# Altium PCB ESP32 with USBC.PcbDoc (part 2 of 2)
Units mil, origin at the board's own origin, x right, y up, seen from the top; angles counter-clockwise.
Board outline 2700 x 1000 mil, 4 copper layers (Top Layer, L2, L3, Bottom Layer), stack 61.583 mil thick; 64 components, 73 nets, 299 pads, 159 vias.
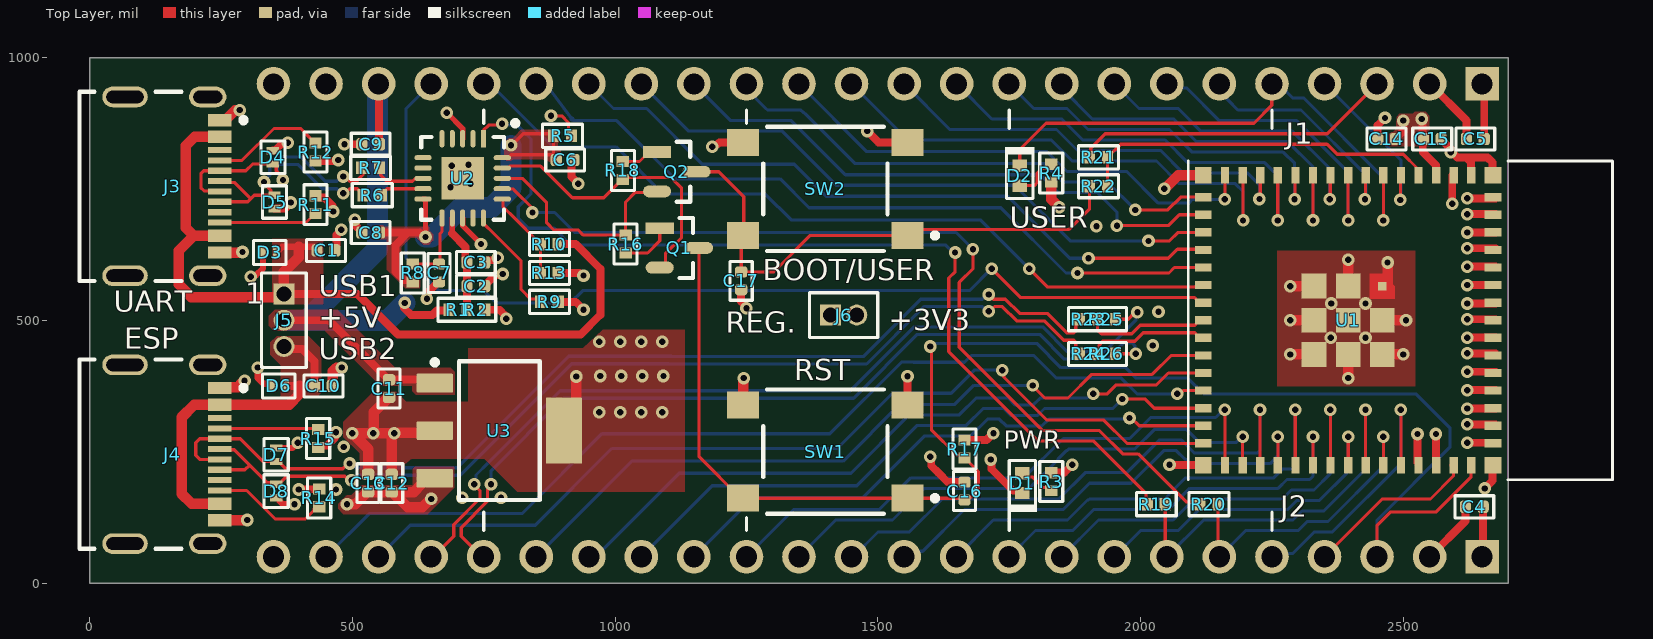
[diagram p0: Top Layer view]

## Via types
v1: diameter 24, hole 12, Top Layer to Bottom Layer, tented both sides, 159 vias

## Nets (pads, with @x,y where several pads share a name; then routed paths per layer and width w, separated by ;. In a path a pad name is that pad's centre, name@x,y a point inside that pad or via, vN(x,y) a via of type N, cw(c..) or ccw(c..) an arc to the next point about the centre after c; other vN are vias at no path point)
+3V3: C4.2 C5.2 C14.2 C15.2 J1.2 J2.1 J6.2 R2.1 R3.2 R4.2 R5.1 R17.2 U1.3 | length 4924.6
  Top Layer w6: v1(878,889) 898.44,889 911.38,876.06 911.38,857.81 914.19,855 R5.1@917.01,855
  Top Layer w15: R2.1 780.06,520 791.28,508.78 791.28,504.72 v1(793,503) ; R17.2 1707.01,272.01 v1(1720,285) ; R3.2 1855,210 v1(1870,225) ; C14.2 2485,846.18 2488.13,849.31 2489.31,849.31 2500,860 v1(2500,880) ; v1(2535,883) 2536.54,881.46 2536.54,846.86 2538.23,845.16 2537,843.93 2537,820 2561.99,795.01 2561.99,775.96 U1.3 ; J1.2 2620,880 C5.2 ; J2.1 2651.93,51.93 C4.2
  Top Layer w20: R4.2 1830,730 v1(1845,715)
  L2 w20: v1(2500,880) 2500.77,880.77 2531.68,880.77 2533.92,883 v1(2535,883) ; v1@2536.23,884.23 2536.23,882.85 2536.85,882.23 2573.02,882.23 2653.5,801.76 2653.5,253.71 2623,223.22 2623,146.13 2650,119.13 J2.1
  L2 w40: v1(793,503) 703,593 703,662.4 842.6,802 991,802 ; v1(878,889) 904,889 991,802 ; J6.2 1460,602.67 1572.33,715 ; v1(1720,285) 1810,285 ; v1(1870,225) 1810,285 ; v1(2535,883) 2535,865 2488,818 1948,818 v1(1845,715) ; v1@2536.23,884.23 2545.41,893.41 2545.41,945.41 J1.2 ; 991,802 1105,802 1192,715 1572.33,715 ; 1572.33,715 v1(1845,715) ; 1810,285 1837,312 1837,707 v1(1845,715)
+3V3_FTDI: C6.2 C8.2 R5.2 R8.1 U2.10 U2.20 | length 805.1
  Top Layer w6: U2.20 796.72,809.37 802.35,815 C6.2@886.14,815 ; v1(802,833) 803.25,833 825.25,855 882.99,855 882.99,819.33
  Top Layer w10.01: U2.10 639.11,730.63 639.34,730.4 v1(639.34,658.34)
  Top Layer w15: C8.2 552.17,667.24 606.24,667.24 ; R8.1 611.87,576.12 598.7,576.12 582,592.82 582,643 606.24,667.24 ; v1(639.34,658.34) 636.9,658.34 628,667.24 606.24,667.24
  Bottom Layer w40: v1(639.34,658.34) 650.34,658.34 707,715 765.09,715 802,751.91 v1(802,833)
+3V3_REG: C12.2 C13.2 J6.1 U3.3 | length 1254.6
  Top Layer w20: v1(490,150) 505.75,150 528.82,173.07 C13.2 C12.2 616.81,173.07 632.52,188.78 632.52,191.73 640.24,199.45 U3.3 ; C12.2@576.18,173.07 605.28,143.97 632.89,143.97 648.92,160 v1(650,160)
  L2 w40: v1(650,160) 690,120 975,120 1132,277 1132,336.4 1235.3,439.7 1339.7,439.7 J6.1
+5V: C9.2 C11.2 J1.22 J5.2 R1.1 U3.1 | length 1297.3
  Top Layer w10.01: C9.2@550.96,835.96 C9.2
  Top Layer w15: J5.2 455.75,500 568.82,386.93 650.59,386.93 U3.1 ; C9.2@550.96,835.96 J1.22@550.96,949.04 ; v1@598,524 612,510 652.72,510 661.22,518.5 682.47,518.5 R1.1
  Bottom Layer w40: J5.2 412.87,500 ; J1.22 548,948 548,635.13 412.87,500 ; v1(600,533) 567,500 412.87,500
+5V_VBUS1: C1.2 D3.2 J3.A4B9 J3.B4A9 J5.1 R10.2 | length 1642.7
  Top Layer w12: D3.2 366.8,640 397.93,640 433.07,640 C1.2@437.7,635.37
  Top Layer w15: J5.1 510,550 587,473 934.72,473 972,510.28 972,598 925,645 R10.2
  Top Layer w20: J3.B4A9 247.07,661 198,661 ; J3.A4B9 200.59,849.41 183,831.82 183,676 198,661 ; 397.93,640 397.93,619.93 370,592 J5.1 364,544 193.97,544 169.57,568.4 169.57,632.57 198,661
+5V_VBUS2: C10.2 D6.2 J4.A4B9 J4.B4A9 J5.3 | length 656.4
  Top Layer w15: J5.3 374.78,445.22 404.78,445.22 428.07,421.93 C10.2 400.43,375 D6.2
  Top Layer w20: J4.B4A9 194.41,150.59 175,170 175,315 199.57,339.57 J4.A4B9 379.57,339.57 400,360 400,374.57 400.43,375
+VCC_FTDI: C2.2 C3.2 R1.2 R2.2 U2.12 | length 186.8
  Top Layer w10.01: 689.99,665 689.99,694.26 U2.12
  Top Layer w15: 689.99,665 715.5,639.49 715.5,635.45 714.97,634.91 714.97,613.1 C3.2 C2.2 718.03,564.96 R1.2 R1.2
BTN_GPIO0: C17.2 Q2.3 R22.1 SW2.1 SW2.2 | length 1010.7
  Top Layer w6: Q2.3 1197.4,782.6 1245,735 1245,662.91 SW2.2 1240,657.91 C17.2 1301.93,591.93 1371.42,661.42 SW2.1 1568.08,673 1864,673 1902.99,711.99 R22.1
CHIP_PU: C16.2 J2.3 Q1.3 R17.1 SW1.1 SW1.2 U1.45 | length 2946.1
  Top Layer w6: Q1.3 1159.85,240.15 1238.58,161.42 SW1.2 SW1.1 1655.13,161.42 C16.2@1661.74,154.81 ; v1(1600,450) 1602.01,447.99 1602.01,291.35 1649.73,243.62 1659.37,243.62 R17.1 1666.18,237.99 1671.81,232.36 1671.81,231.18 1691.81,211.18 1691.81,178.39 1676.73,163.31 1670.24,163.31 C16.2 ; J2.3 2450,110 2475,135 2562.02,135 2628.92,201.9 U1.45@2628.92,224.04
  Top Layer w15: U1.45@2628.92,224.04 U1.45
  Bottom Layer w6: v1(1600,450) 1603.79,450 1609.79,456 1802.28,456 1848.28,410 1971.47,410 1991.47,390 2090,390 2120,360 2523.66,360 2588.97,294.69 2588.97,258.97 2450,120 J2.3
CON1_USB_N: D4.2 J3.A7 J3.B7 R6.1 | length 479.1
  Top Layer w6.23: J3.A7 246.73,745.98 218.02,745.98 212,752 212,779 217.45,784.45 J3.B7 297.35,784.45 310.11,797.2 D4.2 353.92,797.2 355.19,795.94 355.19,784.62 368,771.81 v1(368,767) ; v1(483,741.5) 486.65,741.5 495.53,750.39 509.79,750.39 520.99,739.18 R6.1
  Bottom Layer w6.23: v1(368,767) 368,768.65 357.11,779.53 357.11,792.92 360.76,796.57 396.43,796.57 442.61,750.39 470.47,750.39 479.35,741.5 v1(483,741.5)
CON1_USB_P: D5.2 J3.A6 J3.B6 R7.1 | length 469.5
  Top Layer w6.23: J3.B6 300.92,725.39 313.32,737.8 D5.2@348.47,737.8 ; J3.A6 250.3,762.1 276.62,762.1 307.12,731.59 ; v1(332,763) 332,760.49 344.69,747.8 344.69,741.57 D5.2@348.47,737.8 ; D5.2 348.87,737.8 D5.2@348.47,737.8 ; v1(483,773.5) 486.65,773.5 495.53,764.61 508.83,764.61 512.48,768.26 512.48,769.49 519.99,777
  Bottom Layer w6.23: v1(332,763) 332,764.65 342.89,775.53 342.89,798.82 354.87,810.8 402.32,810.8 448.51,764.61 470.47,764.61 479.35,773.5 v1(483,773.5)
CON2_USB_N: D7.2 J4.A7 J4.B7 R23.1 | length 1975.6
  Top Layer w6.23: J4.A7 209.88,235.24 202,243.11 202,266.89 209.72,274.61 J4.B7 286.92,274.61 330.32,231.2 D7.2 359.92,231.2 373.47,217.66 482.26,217.66 491.14,226.55 491.14,227.34 v1(494.79,227.34) ; v1(1711,549.11) 1711.11,549.11 1720,540.23 1742.77,540.23 1770,513 1822.41,513 1859.3,476.11 1872.83,476.11 1876.48,479.76 1876.48,494.49 R23.1
  Bottom Layer w6.23: v1(494.79,227.34) 499.44,227.34 507.33,219.46 699.65,219.46 911.53,431.34 1107.47,431.34 1107.81,431 1472.65,431 1581.88,540.23 1698.47,540.23 1707.35,549.11 v1(1711,549.11)
CON2_USB_P: D8.2 J4.A6 J4.B6 R24.1 | length 1924.7
  Top Layer w6.23: J4.B6 295.55,215.55 304.54,224.54 ; J4.A6 249.03,253.53 275.55,253.53 304.54,224.54 ; v1(498.39,195.55) 493.58,195.55 486.05,203.08 375.21,203.08 359.92,187.8 D8.2 352.13,190.67 338.42,190.67 304.54,224.54 ; v1(1711,517.11) 1713.11,517.11 1722,526 1736.88,526 1764.11,498.77 1816.52,498.77 1853.4,461.89 1872.83,461.89 1876.48,458.24 1876.48,443.51 R24.1
  Bottom Layer w6.23: v1(498.39,195.55) 501.24,195.55 510.92,205.23 705.54,205.23 917.43,417.11 1101.57,417.11 1101.92,416.77 1478.54,416.77 1587.77,526 1698.47,526 1707.35,517.11 v1(1711,517.11)
CON_ESP_USB_N: J2.21 R25.1 | length 1682.4
  Top Layer w6.23: J2.21 653.89,50 692.89,89 692.89,110.97 743,161.08 743,175.47 732,186.47 v1(732,188)
  Top Layer w6.43: R25.1 1976.39,502 1989.39,515 v1(1994,515)
  Bottom Layer w6.23: v1(732,188) 735.4,191.4 735.4,205.52 759.95,230.07 895.88,366 1447.89,366 1569.24,487.34 1813.85,487.34 1860.85,440.34 1931.34,440.34 1991.14,500.14 1991.14,512.14 v1(1994,515)
CON_ESP_USB_P: J2.20 R26.1 | length 1622.1
  Top Layer w6.23: J2.20 746.11,50 707.11,89 707.11,105.07 757.23,155.19 757.23,176.42 764,183.19 v1(764,188)
  Top Layer w6.43: R26.1 v1@1983,436
  Bottom Layer w6.23: v1(764,188) 764,214 901.77,351.77 1453.79,351.77 1575.13,473.11 1807.96,473.11 1854.96,426.11 1937.24,426.11 1968.12,457 1984,457 1989.14,451.86 1989.14,437.86 v1(1991,436)
CON_GPIO0: J1.3 R21.1 | length 613.8
  Top Layer w6: R21.1 1905.2,812.2 1905.2,827.3 1932.9,855 2355,855 J1.3
DTR_FTDI: Q2.2 R16.1 U2.18 | length 432.9
  Top Layer w6: U2.18 809.91,770 810,769.91 823.37,769.91 869.77,723.51 869.77,685.64 883.6,671.81 930.01,671.81 939.81,662.01 R16.1 1020,725 1038.28,743.28 1078.09,743.28 Q2.2
ESP_USB_N: R23.2 R25.2 U1.23 | length 235.8
  Top Layer w6.43: R25.2 1917.99,482.01 1925.57,474.43 1982.97,474.43 1999.02,490.48 2103.15,490.48 2106.92,494.25 2106.92,495.34 2111.57,500 U1.23
ESP_USB_P: R24.2 R26.2 U1.24 | length 230.8
  Top Layer w6.43: R26.2@1920.07,436.06 R26.2@1921.01,437 ; R26.2@1920.94,435.94 1920.94,452.69 1928.25,460 1988.95,460 2005,476.05 2103.15,476.05 2106.92,472.29 2106.92,471.19 2111.57,466.54 U1.24
FTDI_RESET: C7.2 R8.2 U2.11 | length 140
  Top Layer w6: R8.2 R8.2 664.96,606.97 C7.2 667,608.93 667,665 670.63,668.63 U2.11
FTDI_USB_N: R6.2 U2.9 | length 85.4
  Top Layer w6.23: R6.2 555.01,739.18 566.14,750.32 605,750.32 U2.9
FTDI_USB_P: R7.2 U2.8 | length 88.7
  Top Layer w6.23: 554.01,777 554.01,775.82 565.28,764.55 605,764.55 614.57,764.55 619.39,769.37 633.95,769.37 U2.8
GND: C1.1 C2.1 C3.1 C4.1 C5.1 C6.1 C7.1 C8.1 C9.1 C10.1 C11.1 C12.1 C13.1 C14.1 C15.1 C16.1 C17.1 D1.1 D3.1 D4.1 D5.1 D6.1 D7.1 D8.1 J1.1 J1.23 J2.2 J2.24 J3.A1B12 J3.B1A12 J3.S1 J3.S2 J3.S3 J3.S4 J4.A1B12 J4.B1A12 J4.S1 J4.S2 J4.S3 J4.S4 R9.2 R11.1 R12.1 R13.2 R14.1 R15.1 SW1.3 SW1.4 SW2.3 SW2.4 U1.1 U1.2 U1.42 U1.43 U1.46 U1.47 U1.48 U1.49 U1.50 U1.51 U1.52 U1.53 U1.54 U1.55 U1.56 U1.57 U1.58 U1.59 U1.60 U1.61 U1.62 U1.63 U1.64 U1.65 U1.66 U1.67 U1.68 U1.69 U1.70 U1.71 U1.72 U1.73 U2.3 U2.13 U2.21 U3.2 U3.4 | length 4157.7
  Top Layer w10.01: v1(680,895) 710,865 U2.3 ; U2.13 710,680 725,665 v1(745,645)
  Top Layer w12: v1(306.8,583) 309.09,585.3 316.31,585.3 330.2,599.19 D3.1@330.2,628 ; v1(320,410) 320,390 331.02,378.98 346.31,378.98 347.2,378.09 D6.1 ; D8.1@353.41,163.09 359.03,163.09 360.81,161.31 360.81,157.03 367.84,150 v1(390,150) ; D7.1 385.97,256.8 v1(396.18,267)
  Top Layer w15: D4.1 352.7,822.8 364.91,835 v1@369,835 ; D5.1 352.61,712.81 371.81,712.81 v1(383,724) ; v1(398,178) 398.5,178.5 436.5,178.5 R14.1 ; R11.1 433.13,733.88 446.3,733.88 462.28,717.9 462.28,708.72 v1(464,707) ; R12.1 468.56,802.99 470.56,805 v1(473,805) ; R15.1 438.13,261.12 451.3,261.12 467.28,277.1 467.28,285.28 v1(469,287) ; C1.1@466.93,640 470.06,643.13 470.06,662.06 v1@473,665 ; v1(485,835) C9.1 ; v1(505,691) 505,681.25 518.07,668.18 C8.1 ; v1(642,541) 643.72,542.72 643.72,552.97 663.82,573.07 C7.1 ; C2.1 751.93,566.18 772.03,586.28 784.28,586.28 v1(786,588) ; C3.1 751.93,611.18 755.06,614.31 769.88,614.31 774.56,619 v1(777,619) ; R9.2 925,535 v1(940,520) ; R13.2 932.56,590 937.56,585 v1(940,585) ; C6.1@916.93,805 916.93,773.07 v1(930,760) ; v1@1195,835 1198.58,838.58 SW2.4 ; C17.1 1240,535.44 1250,525.44 v1(1250,523) ; v1(1480,860) 1501.42,838.58 SW2.3 ; v1@1555,395 v1(1556.5,393.5) SW1.3 ; v1(1600,240) 1601.72,238.28 1601.72,223.28 1615.41,209.59 1633.07,191.93 C16.1 ; v1(1715,235) 1716.08,233.92 1716.08,217.29 1757.75,175.61 1770.69,175.61 D1.1 ; v1(2055,225) 2055.59,224.41 U1.64 ; C14.1 2451.14,871.14 v1(2465,885) ; U1.42@2526.97,229.41 v1(2526.97,283.5) ; J2.2 2618.07,118.07 C4.1 ; U1.43@2561.97,229.41 v1(2561.97,283.5) ; C15.1 2571.93,843.82 2590,825.75 v1(2590,820) 2592.44,820 2602.57,809.87 2620.13,809.87 ; v1(2593.03,721.5) U1.2@2593.03,775.59 ; v1(2621.5,266.97) U1.46@2675.59,266.97 ; v1(2621.5,301.97) U1.47@2675.59,301.97 ; v1(2621.5,331.97) U1.48@2675.59,331.97 ; v1(2621.5,366.97) U1.49@2675.59,366.97 ; v1(2621.5,401.97) U1.50@2675.59,401.97 ; v1(2621.5,436.97) U1.51@2675.59,436.97 ; v1(2621.5,466.97) U1.52@2675.59,466.97 ; v1(2621.5,501.97) U1.53@2675.59,501.97 ; v1(2621.5,531.97) U1.54@2675.59,531.97 ; v1(2621.5,566.97) U1.55@2675.59,566.97 ; v1(2621.5,601.97) U1.56@2675.59,601.97 ; v1(2621.5,636.97) U1.57@2675.59,636.97 ; v1(2621.5,666.97) U1.58@2675.59,666.97 ; v1(2621.5,701.97) U1.59@2675.59,701.97 ; v1(2621.5,731.97) U1.60@2675.59,731.97 ; U1.1 2628.92,775.96 2628.92,801.08 2620.13,809.87 ; J1.1 2653.86,946.14 C5.1 ; v1(2655,180) 2670,195 2670,223.78 U1.65 ; U1.62 2670,776.22 2670,800 2660.13,809.87 2620.13,809.87
  Top Layer w20: J4.B1A12 299.09,119.09 v1(300,120) ; J4.A1B12 249.45,372.87 281.79,372.87 290,381.08 293.92,385 v1(295,385) ; J3.B1A12 289.94,628.94 v1(291,630) ; J3.A1B12 258.46,880.91 277.56,900 v1(286,900) ; C10.1 462.56,375.63 462.56,402.56 v1@470,410 ; C13.1 530,255 v1(500,285) v1(540,285) ; C11.1 568.82,353.07 540.77,325.02 540.77,285.77 v1(540,285) ; C12.1 575,278.92 580,283.92 v1(580,285) ; U3.2 652.73,285.77 580.77,285.77 v1(580,285) ; U3.4 925.71,312.68 925.71,392.71 v1(926,393) ; SW1.4 1243.5,388.5 v1(1245,390) ; v1(2045,750) 2046.08,750 2071.67,775.59 U1.63 ; v1(2285,565) v1(2285,565) U1.71 ; v1(2285,435) U1.73 ; v1(2285,500) U1.72 ; U1.69@2394.96,569.92 v1(2395,615) ; v1(2395,390) U1.70@2395.02,430.06 ; U1.68@2454.92,435.04 U1.68 v1(2500,435) ; U1.67@2459.92,500.04 v1(2505,500) ; 2469.96,564.92 v1(2470,610) ; v1(540,285) v1(580,285)
  other v1: 709,162 783,162 469,178 484,259 970,325 1010,325 1050,325 1090,325 972,394 1012,394 1052,394 1092,394 480,410 2023,452 970,459 1010,459 1050,459 1090,459 2362,467 2428,467 2034,516 2363,532 2428,532 479,672 1916,679 687,753 725,760 689,794 721,796 1185,830 377,838
GPIO0: R21.2 R22.2 U1.4 | length 688.5
  Top Layer w6: R22.2 R21.2 1962.01,835 2355,835 2374,816 2499.86,816 2526.02,789.84 2526.02,778.46 U1.4
GPIO1: J1.4 U1.5 | length 329
  Top Layer w6: v1(2494,729) 2494.72,729.72 2494.72,774.87 U1.5
  Bottom Layer w6: J1.4 2495.43,804.57 2495.43,730.43 v1(2494,729)
GPIO2: D2.1 J1.5 U1.6 | length 1043
  Top Layer w6: D2.1 1770,825 1820,875 2215.82,875 2249.67,908.86 2249.67,949.67 J1.5 ; v1(2462,690) U1.6@2461.98,778.54
  Bottom Layer w6: J1.5 2262.47,950 2289.47,923 2310.53,923 2462,771.53 v1(2462,690)
GPIO3: J1.6 U1.7 | length 452.6
  Top Layer w6: v1(2426.93,730) 2427.72,730.79 2427.72,774.8 U1.7
  Bottom Layer w6: J1.6 2150,935.39 2165.8,919.59 2165.8,919.33 2185.13,900 2305.25,900 2428.5,776.74 2428.5,731.57 v1(2426.93,730)
GPIO4: J1.7 U1.8 | length 592.2
  Top Layer w6: v1(2395,690) U1.8 U1.8
  Bottom Layer w6: J1.7 2058.23,941.77 2088.23,941.77 2150,880 2296.96,880 2395,781.96 v1(2395,690)
GPIO5: J1.8 U1.9 | length 581.7
  Top Layer w6: v1(2360,730) 2360.79,730.79 2360.79,774.8 U1.9
  Bottom Layer w6: J1.8 1997,903 2071.6,903 2114.6,860 2288.68,860 2360,788.68 v1(2360,730)
GPIO6: J1.9 U1.10 | length 736.1
  Top Layer w6: v1(2328.07,690) U1.10
  Bottom Layer w6: J1.9 1850,941.28 1908.28,883 2063.32,883 2106.32,840 2280,840 2328.07,791.93 v1(2328.07,690)
GPIO7: J1.10 U1.11 | length 720.7
  Top Layer w6: v1(2293.07,730) 2293.86,730.79 2293.86,774.8 U1.11
  Bottom Layer w6: J1.10 1797,903 1860,903 1900,863 2055.04,863 2098.04,820 2271.72,820 2293.07,798.64 v1(2293.07,730)
GPIO8: J1.11 U1.12 | length 854.1
  Top Layer w6: v1(2261.14,690) U1.12@2261.14,775.59
  Bottom Layer w6: J1.11 1717,883 1850,883 1890,843 2046.75,843 2089.75,800 2236,800 2261.14,774.86 v1(2261.14,690)
GPIO9: J1.12 U1.13 | length 839.7
  Top Layer w6: v1(2226.14,730.79) 2227.72,732.36 U1.13@2227.72,787.06
  Bottom Layer w6: J1.12 1637,863 1840,863 1880,823 2038.47,823 2081.47,780 2204,780 2226.14,757.86 v1(2226.14,730.79)
GPIO10: J1.13 U1.14 | length 970.8
  Top Layer w6: v1(2195,690) 2194.63,690.37 2194.63,775.22 U1.14@2195,775.59
  Bottom Layer w6: J1.13 1557,843 1830,843 1870,803 2030.18,803 2073.18,760 2180,760 2195,745 v1(2195,690)
GPIO11: J1.14 U1.15 | length 952.6
  Top Layer w6: v1(2160,730) 2160.39,730.39 2160.39,774.49 U1.15@2161.14,775.24
  Bottom Layer w6: J1.14 1479,821 1822,821 1860,783 1973.82,783 2033.82,723 2091.51,723 2098.51,730 v1(2160,730)
GPIO12: J1.15 U1.16 | length 984.3
  Top Layer w6: v1(1990,710) 2052,710 2076.25,734.25 U1.16
  Bottom Layer w6: J1.15 1250,940 1287.07,902.93 1290,900 1353.28,900 1362.96,892.04 1457,798 1816.72,798 1851.72,763 1937,763 v1(1990,710)
GPIO13: J1.16 U1.17 | length 1105.1
  Top Layer w6: v1(1955,680) 2053,680 2073.79,700.79 U1.17
  Bottom Layer w6: J1.16 1220,880 1335.3,880 1438.3,777 1809.43,777 1843.43,743 1918,743 1955,706 v1(1955,680)
GPIO14: J1.17 U1.18 | length 1200.1
  Top Layer w6: v1(2015,651) 2055,651 2071.32,667.32 U1.18
  Bottom Layer w6: J1.17 1140,860 1318,860 1421,757 1760,757 1866,651 v1(2015,651)
GPIO15: J1.18 U1.19 | length 1314.5
  Top Layer w6: v1(1901,618) 2053,618 2070,635 2118.31,635 U1.19
  Bottom Layer w6: J1.18 997,903 1060,903 1166,797 1341,797 1402,736 1747,736 1865,618 v1(1901,618)
GPIO16: J1.19 U1.20 | length 1427.1
  Top Layer w6: v1(1880,590) 2054,590 2064.39,600.39 U1.20
  Bottom Layer w6: J1.19 869,947.31 871.87,944.45 917.77,883.43 918.26,882.93 921.19,880 1003,880 1114,769 1314,769 1369,714 1734,714 1858,590 v1(1880,590)
GPIO17: J1.20 U1.21 | length 1531.4
  Top Layer w6: v1(1788,598) 1823,563 2102.84,563 2103.9,564.06 2116.57,564.06 U1.21
  Bottom Layer w6: J1.20 762,950 882,830 1002,830 1092,740 1286,740 1335,691 1695,691 v1(1788,598)
GPIO18: J1.21 U1.22 | length 1958
  Top Layer w6: v1(1717,598) 1772,543 2102.84,543 2108.7,537.14 2108.7,536.34 2111.57,533.46 U1.22
  Bottom Layer w6: J1.21 602,902 602,619.18 664.84,556.34 750.47,556.34 773.82,533 914.82,533 938.16,556.34 1674.53,556.34 1716.18,598 v1(1717,598)
GPIO21: J2.19 U1.25 | length 1440.5
  Top Layer w6: v1@1800,370 1818,352 1862,352 1907,397 2022,397 2058.07,433.07 U1.25
  Bottom Layer w6: J2.19 1032,232 1434,232 1542,340 1646.72,340 1682.72,376 v1(1795,376)
GPIO26: J2.18 U1.26 | length 1325
  Top Layer w6: v1(1910,360) 1936.82,360 1953.82,377 2030.28,377 2052.89,399.61 U1.26
  Bottom Layer w6: J2.18 963,50 1122,209 1449,209 1560,320 1655,320 1687,352 1747.75,352 1760.75,339 1795.86,339 1805.86,349 1806.18,349 1809.18,352 1898.21,352 1906.21,360 v1(1910,360)
GPIO33: J2.17 U1.28 | length 1211.7
  Top Layer w6: v1(1965,350) 2008.79,350 2026.11,332.68 U1.28
  Bottom Layer w6: J2.17 1185,185 1460,185 1575,300 1668.53,300 1700.53,332 1739.47,332 1752.47,319 1804.15,319 1817.15,332 1947,332 v1(1965,350)
GPIO34: J2.16 U1.29 | length 1095.7
  Top Layer w6: v1(1979,314) 1982.79,314 1997.58,299.21 U1.29
  Bottom Layer w6: J2.16 1263,163 1472.28,163 1589.28,280 1676.82,280 1708.82,312 1731.18,312 1744.18,299 1812.43,299 1825.43,312 1977,312 v1(1979,314)
GPIO35: J2.15 U1.31 | length 1131.9
  Top Layer w6: v1(2160,330) 2160.39,329.61 2160.39,224.8 U1.31
  Bottom Layer w6: J2.15 1340,140 1503,140 1563,200 1778,200 1853,275 1979.14,275 2019.14,315 2142.82,315 2157.82,330 v1(2160,330)
GPIO36: J2.14 U1.32 | length 1014.2
  Top Layer w6: U1.32 v1(2194.25,278.5)
  Bottom Layer w6: J2.14 1420,120 1528,120 1588,180 1788,180 1843,235 1843,236.18 1858.82,252 1860,252 1863,255 1989.14,255 2026.14,292 2088,292 2112.72,267.28 2181.39,267.28 2192.61,278.5 v1(2194.25,278.5)
GPIO37: J2.13 U1.33 | length 1064.5
  Top Layer w6: v1(2227.28,330) 2227.5,329.78 2227.5,224.7 U1.33@2227.76,224.45
  Bottom Layer w6: J2.13 1453.28,50 1500.28,97 1560,97 1623,160 1844.43,160 1894.43,210 1973.53,210 2035.53,272 2078,272 2102.72,247.28 2221.43,247.28 2227.28,253.14 v1(2227.28,330)
GPIO38: J2.12 U1.34 | length 901.8
  Top Layer w6: U1.34 v1(2261.18,278.5)
  Bottom Layer w6: J2.12 1560.33,60.33 1585.33,60.33 1665,140 1852.72,140 1902.72,190 1981.82,190 2043.82,252 2068,252 2083.97,236.03 2085.68,236.03 2094.43,227.28 2246.57,227.28 2261.18,241.89 v1(2261.18,278.5)
GPIO39: J2.11 U1.35 | length 928.7
  Top Layer w6: v1(2294.21,330) 2294.43,329.78 2294.43,224.7 U1.35@2294.69,224.45
  Bottom Layer w6: J2.11 1720,120 1861,120 1899,158 1900.72,158 1902.72,160 2045.43,160 2085.43,200 2253.43,200 2270.43,217 2288.35,217 2294.21,222.86 v1(2294.21,330)
GPIO40: J2.10 U1.36 | length 770.9
  Top Layer w6: U1.36 v1(2328.11,278.5)
  Bottom Layer w6: J2.10 1800,100 1871,100 1911,140 2053.72,140 2093.72,180 2261.72,180 2278.72,197 2321.72,197 2328.11,203.39 v1(2328.11,278.5)
GPIO41: J2.9 U1.37 | length 804.3
  Top Layer w6: v1(2361.14,330) 2361.36,329.78 2361.36,224.7 U1.37
  Bottom Layer w6: J2.9 1920,120 2062,120 2102,160 2270,160 2287,177 2330,177 2361.14,208.14 v1(2361.14,330)
GPIO42: J2.8 U1.38 | length 632.7
  Top Layer w6: U1.38 v1(2395.04,278.5)
  Bottom Layer w6: J2.8 2000,100 2071.72,100 2111.72,140 2280,140 2297,157 2340,157 2395.04,212.04 v1(2395.04,278.5)
GPIO45: J2.5 U1.41 | length 527.4
  Top Layer w6: v1(2495,330) 2495.22,329.78 2495.22,224.7 U1.41@2495.47,224.45
  Bottom Layer w6: J2.5 2255.86,55.86 2290,55.86 2290,56.47 2330.53,97 2365,97 2495,227 v1(2495,330)
GPIO46: J2.4 U1.44 | length 329.9
  Top Layer w6: J2.4 2460,160 2551.67,160 2595.45,203.79 U1.44@2595.45,224.04
  Top Layer w15: U1.44@2595.45,224.04 U1.44
GPIO47: J2.23 U1.27 | length 1849.2
  Top Layer w6: v1@2080,365 2081.14,366.14 U1.27
  Bottom Layer w6: J2.23 532,132 823,132 975,284 1408.81,284 1545.31,420.5 1567.68,420.5 1568.18,420 1665,420 1678,433 1797,433 1840,390 1963.18,390 1993.18,360 v1(2070,360)
GPIO48: J2.22 U1.30 | length 1780.3
  Top Layer w6: v1(1737,405.11) 1739.68,402.43 1739.68,392.14 1821.82,310 1930,310 1974.25,265.75 U1.30
  Bottom Layer w6: J2.22 607.07,107.07 610,110 848,110 994,256 1423,256 1528,361 1639.43,361 1683.54,405.11 v1(1737,405.11)
NetD1_2: D1.2 R3.1 | length 68.6
  Top Layer w6: D1.2 1781.81,201.89 1794.11,201.89 1814.39,181.61 1824.37,181.61 R3.1
NetD2_2: D2.2 R4.1 | length 87.6
  Top Layer w6: D2.2 1797.33,756.3 1803.19,762.16 1803.19,779.84 1811.98,788.62 1820.43,788.62 1828.25,796.43 R4.1@1830.57,796.43
NetJ3_A5: J3.A5 R12.2 | length 219.9
  Top Layer w6: J3.A5 290.13,804.13 351,865 402.01,865 423.19,843.82 423.19,842.64 428.82,837.01 R12.2
NetJ3_B5: J3.B5 R11.2 | length 189.4
  Top Layer w6: J3.B5 411.85,686.02 428.82,702.99 R11.2
NetJ4_A5: J4.A5 R15.2 | length 188.3
  Top Layer w6: J4.A5 290,294.29 432.72,294.29 R15.2
NetJ4_B5: J4.B5 R14.2 | length 218.4
  Top Layer w6: J4.B5 298.82,176.18 352.85,122.15 410.97,122.15 427.19,138.36 427.19,141.36 429.82,143.99 R14.2@432.82,143.99
NetQ1_1: Q1.1 R16.2 | length 98.5
  Top Layer w6: R16.2 1061.99,627.99 1085,651 Q1.1
NetQ2_1: Q2.1 R18.2 | length 72.5
  Top Layer w6: R18.2 1046.56,802.01 1064.55,820 Q2.1
NetR9_1: R9.1 U2.15 | length 213.1
  Top Layer w6: U2.15 749.37,683.28 749.6,683.06 751.13,683.06 769.18,665 821,613.18 821,559 839.67,540.33 852.66,540.33 R9.1
RTS_FTDI: Q1.2 R18.1 U2.19 | length 551.6
  Top Layer w6: U2.19@796.94,789.91 800.4,793.37 810,793.37 858.45,793.37 918.82,733 978.83,733 1013.82,767.99 R18.1 1018.47,771.46 1106.33,771.46 1126.72,751.08 1126.72,657.52 1095.65,626.46 1095.65,605.98 1089.86,600.2 Q1.2
RXD_FTDI: R19.2 U2.1 | length 1845.6
  Top Layer w6: U2.1 749.37,861.37 759.32,871.32 782.32,871.32 v1(785,874) ; v1(1647,629) 1647,592.43 1635,580.43 1635,440.25 1805.25,270 1911,270 2010.17,170.83 2010.17,152.82 R19.2
  Bottom Layer w6: v1(785,874) 787.68,871.32 813.68,871.32 840,845 840,740.41 815.77,716.18 815.77,693.82 834.59,675 884,675 916,643 1629.21,643 1643.21,629 v1(1647,629)
TXD_FTDI: R20.2 U2.17 | length 1715.3
  Top Layer w6: U2.17@796.94,750.09 805.67,750.09 810,745.76 840.1,715.67 840.1,707.68 v1(842.77,705) ; v1(1681,635) 1681,598.14 1655,572.14 1655,448.53 1813.53,290 1921.72,290 1965.97,245.75 1995.25,245.75 2086.55,154.45 2108.54,154.45 R20.2
  Bottom Layer w6: v1(842.77,705) 885,705 923,667 1649,667 v1(1681,635)
U0RXD: J2.6 R20.1 U1.40 | length 594.9
  Top Layer w6: R20.1 2147.01,52.99 J2.6 ; U1.40 v1(2461.97,278.5)
  Bottom Layer w6: J2.6 2200,100 2300,100 2317,117 2356.72,117 2461.97,222.25 v1(2461.97,278.5)
U0TXD: J2.7 R19.1 U1.39 | length 767.4
  Top Layer w6: R19.1 2047.01,52.99 J2.7 ; v1(2428.07,330) 2428.29,329.78 2428.29,224.7 U1.39
  Bottom Layer w6: J2.7 2120,120 2290,120 2307,137 2348.43,137 2428.07,216.64 v1(2428.07,330)
VBUS_SENSE: R10.1 R13.1 U2.16 | length 171.9
  Top Layer w6: U2.16 786.28,730.63 786.5,730.4 786.5,716.49 810,692.99 851.18,651.81 852.36,651.81 857.99,646.18 R13.1
pads on no net: J1.24 J3.A8 J3.B8 J4.A8 J4.B8 U2.2 U2.4 U2.5 U2.6 U2.7 U2.14

## Polygon pours and split planes (outlines as drawn)
+5V on Top Layer "+5V_POUR1" (solid, pour order 5): 695,402 687,410 582,410 472,520 352,520 341,509 341,490 351,480 448,480 553,375 614,375 614,365 621,358 695,358
+3V3 on Top Layer "+3V3_POUR2" (solid, pour order 1): 2486.48,887.04 2486.48,864.48 2480,858 2472.48,858 2472.48,831 2549.48,831 2549.48,889.52 2542.52,896.48 2521.73,896.48 2518.25,893 2492.44,893
GND on Top Layer "GND_POUR3" (solid, pour order 9): 976.94,481.79 938.56,447 720.66,447 720.66,344.79 602.94,344.79 583.94,363.79 539.94,363.79 482.94,306.79 482.94,277.79 513.94,246.79 513.94,193.79 582.94,193.79 598.94,209.79 598.94,224.74 612.94,236.79 750.94,236.79 813.94,173.79 1132.94,173.79 1132.94,476.79 1132.94,481.79
+3V3_FTDI on Top Layer "+3V3_FTDI_POUR2" (solid, pour order 3): 629,561 601,561 566,596 566,652 566,654 559,654 537,654 537,681 559,681 562,678 646,678 646,671 656,661 655,660 655,651 653,651 646,644 635,644 622,657 610,657 610,656 593,639 593,595 604,584 629,584
+5V_VBUS1 on Top Layer "+5V_VBUS1_POUR1" (solid, pour order 6): 348,655 445,655 445,530 348,530
+3V3_REG on Top Layer "+3V3_REG_POUR1" (solid, pour order 4): 619,221 615,217 615,186 517,186 498,167 489,167 473,151 473,141 483,131 644,131 694,181 694,221
GND on Top Layer "GND_POUR1" (solid, pour order 8): 2260,632 2523,632 2523,374 2506,374 2260,374
+5V_VBUS2 on Top Layer "+5V_VBUS2_POUR1" (solid, pour order 7): 417,470 441,446 441,362 432,353 364,353 364,414 344,434 344,458 356,470
+3V3_FTDI on Top Layer "+3V3_FTDI_POUR" (solid, pour order 2): 820.55,863 810.07,850.93 805.16,846.02 799.08,846.02 789,840.2 789,803.58 869.43,804.38 878.62,799.44 897,799.44 897,822.27 889.65,826.18 891,837 894.49,837 894,863
+3V3 on L2 "+3V3_POUR1" (solid, remove dead copper, pour order 10): 2690,798.63 2690,992.37 2595.86,992 815,985 815,745 1001.82,745 1095,745 1191.46,648.54 1418.87,650 1435,633.87 1435,488.8 1495,489.71 1495,597.44 1568.47,660.88 1870,660.88 2010,790 2530,790 2530,325 2500,295 2500,205 2430,205 2300,75 2300,10 2690,10 2300,10 2690,10
GND on L2 "GND_POUR2" (solid, remove dead copper, pour order 12): 20,20 2680,20 2680,980 20,980
+3V3_REG on L2 "+3V3_REG_POUR1" (solid, pour order 11): 464,150.3 464,128 699.72,128 686,128 686,145.72 686,191 542,191 518,167 496,167
GND on L3 (split plane): 2699.95,0.05 0.05,0.05 0.05,999.95 2699.95,999.95

## Silkscreen, mask and mechanical layers (free items; w line width, h text height)
Top Overlay:
  lines w6: 750,100 750,135 ; 750,875 750,900 ; 1250,100 1250,125 ; 1250,875 1250,900 ; 1750,100 1750,135 ; 1750,865 1750,900 ; 2250,100 2250,135 ; 2250,865 2250,900
  text "J1" at 2276,836 h40
  text "USER" at 1751,676 h40
  text "BOOT/USER" at 1281,576 h40
  text "USB1" at 436,546 h40
  text "UART" at 46,516 h40
  text "+5V" at 436,486 h40
  text "+3V3" at 1521,481 h40
  text "REG." at 1211,476 h40
  text "ESP" at 66,446 h40
  text "USB2" at 436,426 h40
  text "RST" at 1341,386 h40
  text "PWR" at 1740,244.33 h60
  text "J2" at 2266,126 h40
Bottom Overlay:
  text "IO17" at 769,874 h40 r90
  text "IO16" at 869,874 h40 r90
  text "IO15" at 969,874 h40 r90
  text "IO14" at 1069,874 h40 r90
  text "IO13" at 1169,874 h40 r90
  text "IO12" at 1269,874 h40 r90
  text "IO11" at 1369,874 h40 r90
  text "IO10" at 1469,874 h40 r90
  text "IO9" at 1569,874 h40 r90
  text "IO8" at 1669,874 h40 r90
  text "IO7" at 1769,874 h40 r90
  text "IO6" at 1869,874 h40 r90
  text "IO5" at 1969,874 h40 r90
  text "IO4" at 2069,874 h40 r90
  text "IO3" at 2169,874 h40 r90
  text "IO2" at 2269,874 h40 r90
  text "IO1" at 2369,874 h40 r90
  text "IO0" at 2469,874 h40 r90
  text "+3V3" at 2569,874 h40 r90
  text "GND" at 2669,874 h40 r90
  text "NC" at 367,872 h40 r90
  text "GND" at 467,872 h40 r90
  text "+5V" at 567,872 h40 r90
  text "IO18" at 667,872 h40 r90
  text "<---PIN1--->" at 2669,729 h40 r90
  text "(C)2025 AAKASHDIP" at 1749,436 h40
  text "IO47" at 469,269 h40 r90
  text "IO48" at 569,269 h40 r90
  text "USB-" at 669,269 h40 r90
  text "USB+" at 769,269 h40 r90
  text "IO26" at 969,269 h40 r90
  text "IO33" at 1069,269 h40 r90
  text "IO34" at 1169,269 h40 r90
  text "IO35" at 1269,269 h40 r90
  text "IO36" at 1369,269 h40 r90
  text "IO37" at 1469,269 h40 r90
  text "IO38" at 1569,269 h40 r90
  text "IO39" at 1669,269 h40 r90
  text "IO40" at 1769,269 h40 r90
  text "IO42" at 1969,269 h40 r90
  text "IO45" at 2269,269 h40 r90
  text "IO46" at 2369,269 h40 r90
  text "IO21" at 869,259 h40 r90
  text "IO41" at 1869,259 h40 r90
  text "TXD" at 2069,244 h40 r90
  text "RXD" at 2169,244 h40 r90
  text "GND" at 369,239 h40 r90
  text "GND" at 2569,239 h40 r90
  text "3V3" at 2669,239 h40 r90
  text "EN" at 2469,199 h40 r90
Board Shape:
  the board outline again, w20

## Text inside footprints (layer, text, board x,y; h text height)
J1: Bottom Overlay "1" at 2631,1031 h40 r270
J2: Bottom Overlay "1" at 2627,-34 h40 r270
J5: Top Overlay "1" at 296,531 h40